# Altium PCB 智能门禁扩展板.PcbDoc
Units mil, origin at the board's own origin, x right, y up, seen from the top; angles counter-clockwise.
Board outline 3356.14 x 2209.22 mil, 2 copper layers (Top Layer, Bottom Layer); 36 components, 34 nets, 215 pads, 40 vias.
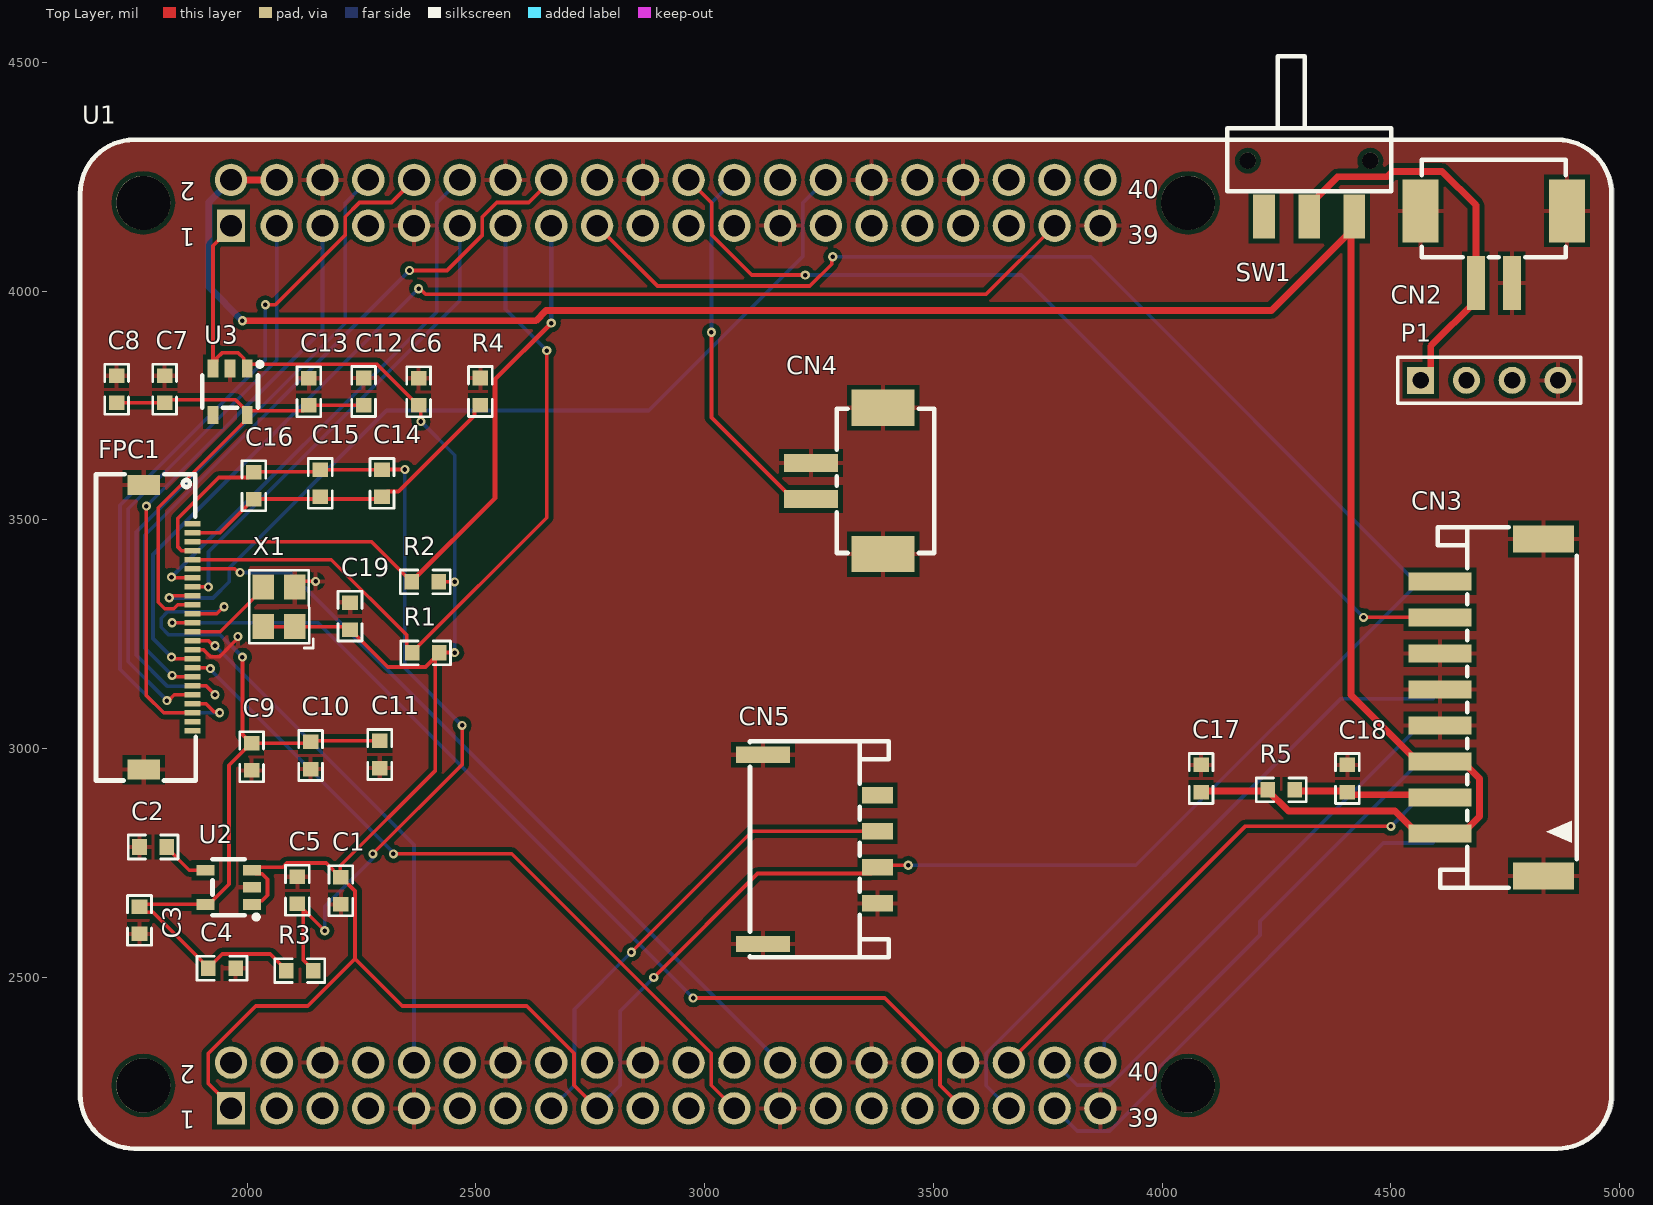
[diagram p0: Top Layer view]
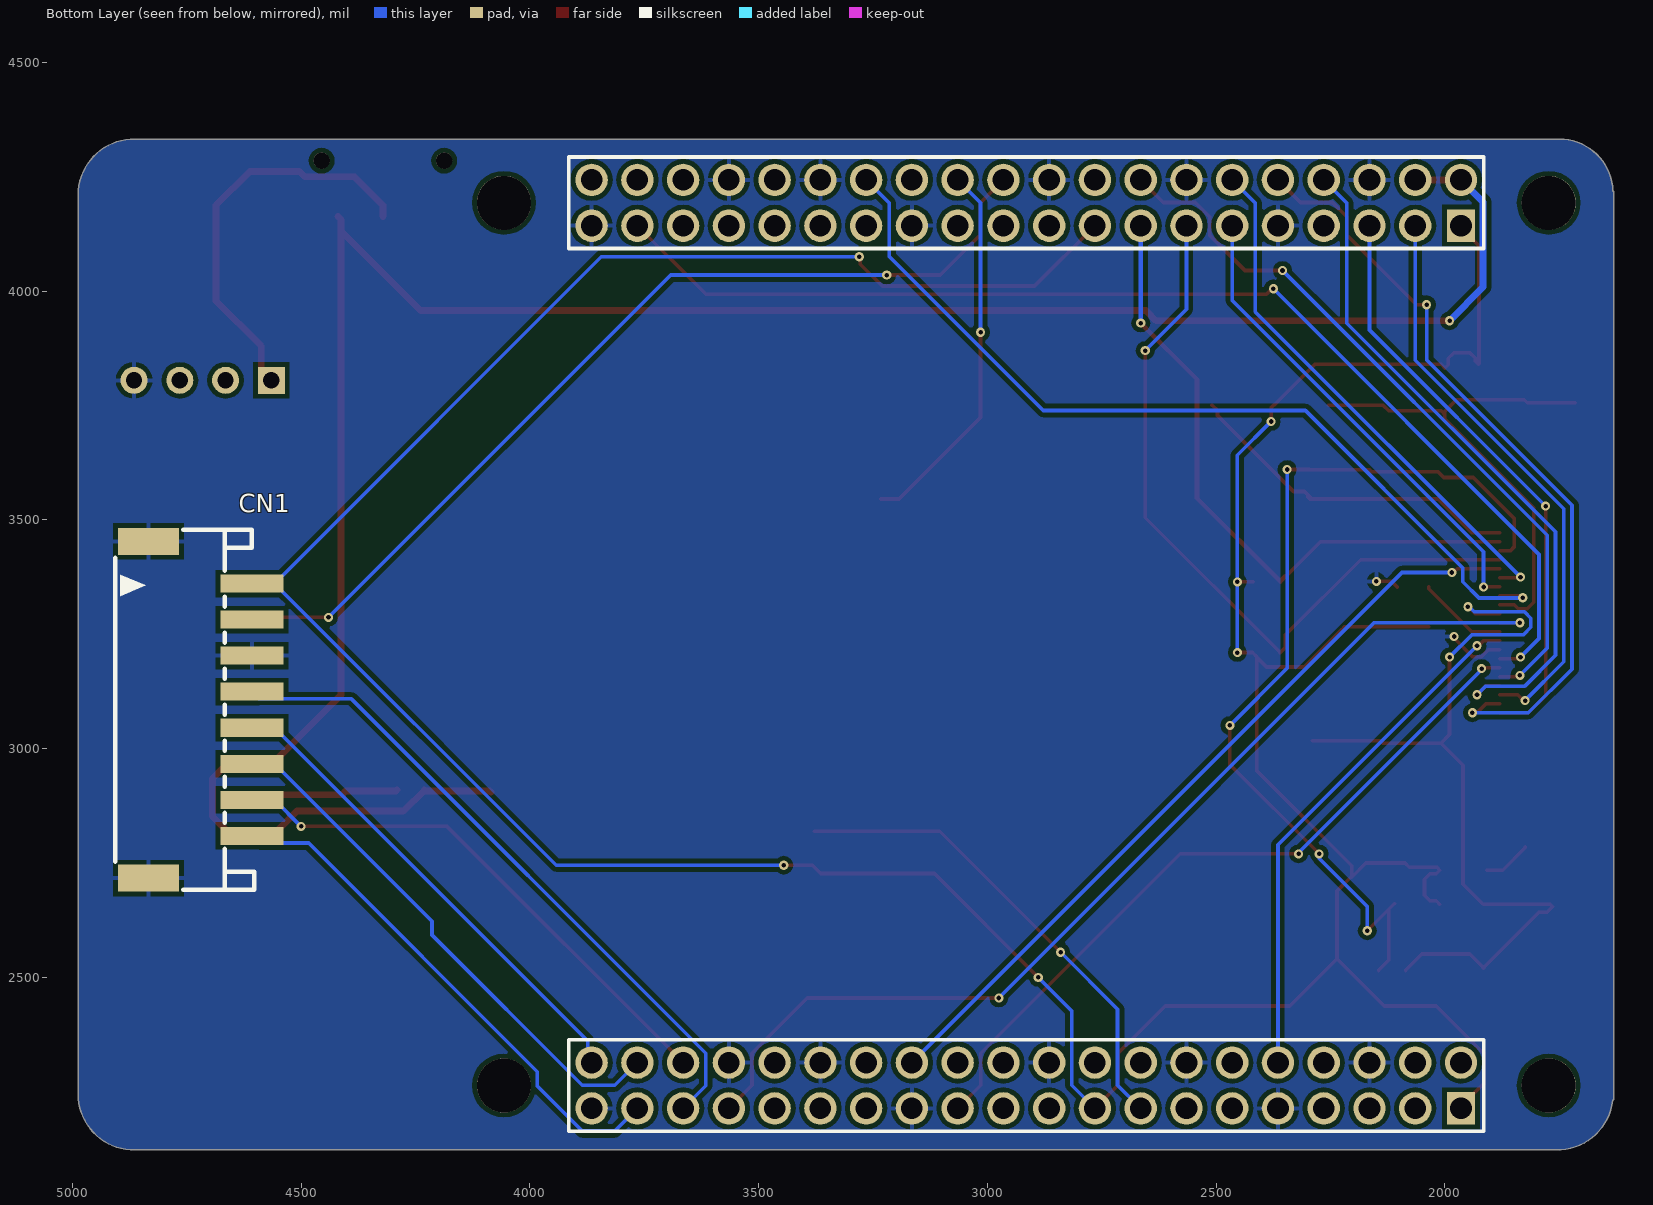
[diagram p1: Bottom Layer view, seen from below]

## Layer stack, top to bottom
Top Solder: solder mask 0.4, Solder Resist, Dk 3.5
Top Layer: signal copper 1.4
Dielectric 1: dielectric 12.6, FR-4, Dk 4.8
Bottom Layer: signal copper 1.4
Bottom Solder: solder mask 0.4, Solder Resist, Dk 3.5

## Board outline
1757.03,2122.89 cw(c1755,2245) 1633.66,2231.22 1633.65,2231.22 cw(c1635,2235) 1630.98,2235 1630.98,4215.16 cw(c1635,4215.16) 1632.97,4218.62 cw(c1749.87,4215.16) 1749.87,4332.11 4862.97,4332.11 cw(c4865,4210) 4987.13,4210 cw(c4865,4210) 4987.11,4208.03 cw(c4983.09,4208.09) 4987.07,4207.49 cw(c4983.09,4206.91) 4987.11,4206.91 4987.11,2247.03 ccw(c4865,2245) 4987.11,2247.06 4987.11,2247.03 cw(c4865,2245) 4987.13,2245 cw(c4865,2245) 4863.03,2122.89 cw(c4863.09,2126.91) 4862.98,2122.89 1757.03,2122.89 ccw(c1755,2245)

## Design rules (kind name [scope] priority, off if disabled: settings)
Clearance [All] p1: gap=10 ignorepadtopadclearanceinfootprint=FALSE except(0: Arc-Hole Track-Hole SMDPad-Hole THPad-Hole Via-Hole Fill-Hole Poly-Hole Region-Hole Text-Hole)
PolygonConnect [All] p1: connectstyle=Relief reliefconductorwidth=10 reliefentries=4 polygonreliefangle="90 Angle" airgapwidth=10
RoutingVias [All] p1: holewidth=10 width=20 viastyle="Through Hole" minholewidth=8 minwidth=10 maxholewidth=28 maxwidth=50
SolderMaskExpansion [All] p1: expansion=4
Width [All] p1: maxlimit=20 minlimit=8 preferedwidth=10
30 further rules are at their usual default settings.

## Components (designator, comment, footprint, x,y, rotation, side; value= is the part's Value field where it differs from the comment)
C1 "Cap" R0603 2210.87,2725.26 r270 top value=1uF
C2 "Cap" R0603 1758.64,2790.87 r0 top value=223
C3 "Cap" R0603 1759.13,2588.64 r90 top value=10uF
C4 "Cap" R0603 1981.36,2514.13 r180 top value=104
C5 "Cap" R0603 2115.87,2726.36 r270 top value=10uF
C6 "Cap" R0603 2369.13,3743.8 r90 top value=1uF
C7 "Cap" R0603 1825.87,3821.36 r270 top value=10uF
C8 "Cap" R0603 1720.87,3821.36 r270 top value=104
C9 "Cap" R0603 2004.13,2946.18 r90 top value=104
C10 "Cap" R0603 2133.14,2948.99 r90 top value=104
C11 "Cap" R0603 2284.13,2951.18 r90 top value=104
C12 "Cap" R0603 2260.87,3816.36 r270 top value=104
C13 "Cap" R0603 2140.87,3815.84 r270 top value=4.7uF
C14 "Cap" R0603 2289.13,3543.64 r90 top value=1uF
C15 "Cap" R0603 2154.13,3543.64 r90 top value=104
C16 "Cap" R0603 2009.13,3538.64 r90 top value=104
C17 "Cap" R0603 4090.87,2970.67 r270 top value=10uF
C18 "Cap" R0603 4410.87,2970.67 r270 top value=104
C19 "Cap" R0603 2230.87,3325.67 r270 top value=0.1uF
CN1 "PH2.0-8P" CONN-SMD_X2016WRS-08-9TSW 4725,3085 r270 bottom
CN2 "PH2.0-2P" CONN-SMD_PH2.0-1X2PW 4725,4125 r0 top
CN3 "PH2.0-8P" CONN-SMD_X2016WRS-08-9TSW 4725,3090 r90 top
CN4 "PH2.0-2P" CONN-SMD_PH2.0-1X2PW 3340,3585 r270 top
CN5 "PH2.0-4PWB卧式" CONN-SMD_PH2.0-4PWB 3240,2780 r90 top
FPC1 "AFC30-S24FCA-00" FPC-SMD_AFC30-S24FCA-00 1781.67,3265.18 r270 top
P1 "Header 4" HDR1X4 4565,3805 r0 top
R1 "Res1" R0603 2354.33,3215.24 r0 top value=10K
R2 "Res1" R0603 2353.64,3370.24 r0 top value=10K
R3 "Res1" R0603 2079.33,2520.87 r0 top value=10R
R4 "Res1" R0603 2504.13,3744.33 r90 top value=0R
R5 "Res1" R0603 4224.33,2915.87 r0 top value=0R
SW1 "TA-3525-A2" SW-SMD_3P-L9.1-W3.5-P2.50-EH6.8 4321.14,4316.53 r180 top
U1 "ART-Pi" "PCBComponent_1 - duplicate" 3308.7,3228.35 r0 top
U2 "RT9193-28GB" SOT-23-5_L3.0-W1.7-P0.95-LS2.8-BR 1960,2695 r0 top
U3 "RT9013-15GB(Z00)" SOT-23-5_L3.0-W1.7-P0.95-LS2.8-BR 1965,3780 r90 top
X1 "OXETGLJANF-24MHZ" OSC-SMD_4P-L3.2-W2.5-BL 2075,3305 r90 top

## Footprints (in the part's own frame and the unit in brackets; to place one, negate y for a bottom-side part, rotate by r counter-clockwise, add the part's x,y. Pads: shape width x height; smd on the part's side, far side on the other; paste and mask are expansions set on the pad)
CONN-SMD_PH2.0-1X2PW [mm]
  rect 1x3 smd: 1(-1,-2.733) 2(1,-2.733)
  rect 2x3.5 smd: 3(4.064,1.278) 4(-4.064,1.278)
  silkscreen extent -4,-1.29 4,4.11
CONN-SMD_PH2.0-4PWB [mm]
  rect 0.9x1.7 smd: 1(-3,-3.5) 2(-1,-3.5) 3(1,-3.5) 4(3,-3.5)
  rect 0.9x3 smd: 5(5.25,2.85) 6(-5.25,2.85)
  silkscreen extent -6,-4.12 6,3.57
CONN-SMD_X2016WRS-08-9TSW [mm]
  rect 1x3.5 smd: 1(-7,2.988) 2(-5,2.988) 3(-3,2.988) 4(-1,2.988) 5(1,2.988) 6(3,2.988) 7(5,2.988) 8(7,2.988)
  rect 1.5x3.4 smd: 9(9.35,-2.761) 10(-9.35,-2.761)
  silkscreen extent -10,-4.61 10,3.11
FPC-SMD_AFC30-S24FCA-00 [mm]
  rect 0.3x0.9 smd: 1(-5.755,2.514) 2(-5.255,2.514) 3(-4.755,2.514) 4(-4.255,2.514) 5(-3.755,2.514) 6(-3.255,2.514) 7(-2.755,2.514) 8(-2.255,2.514) 9(-1.755,2.514) 10(-1.255,2.514) 11(-0.755,2.514) 12(-0.255,2.514) 13(0.245,2.514) 14(0.746,2.514) 15(1.246,2.514) 16(1.746,2.514) 17(2.245,2.514) 18(2.745,2.514) 19(3.245,2.514) 20(3.745,2.514) 21(4.245,2.514) 22(4.745,2.514) 23(5.245,2.514) 24(5.745,2.514)
  rect 1.1x1.8 smd: 25(7.896,-0.186) 26(-7.905,-0.187)
  silkscreen extent -8.5,-2.84 8.5,2.69
HDR1X4 [mm] "Connector; Header; 4 Position"
  rect 1.5x1.5 hole 0.9: 1(0,0)
  round 1.5 hole 0.9: 2(2.54,0) 3(5.08,0) 4(7.62,0)
  silkscreen extent -1.27,-1.27 8.89,1.27
OSC-SMD_4P-L3.2-W2.5-BL [mm]
  rect 1.4x1.2 smd: 1(-0.973,-0.748) 2(1.227,-0.748) 3(1.227,1.002) 4(-0.973,1.002)
  silkscreen extent -2.16,-1.78 2.16,1.78
"PCBComponent_1 - duplicate" [mm]
  rect 1.575x1.8 hole 1.2: 1(-34.13,23.23) 41(-34.13,-25.77)
  round 1.8 hole 1.2: 2(-34.13,25.77) 3(-31.59,23.23) 4(-31.59,25.77) 5(-29.05,23.23) 6(-29.05,25.77) 7(-26.51,23.23) 8(-26.51,25.77) 9(-23.97,23.23) 10(-23.97,25.77) 11(-21.43,23.23) 12(-21.43,25.77) 13(-18.89,23.23) 14(-18.89,25.77) 15(-16.35,23.23) 16(-16.35,25.77) 17(-13.81,23.23) 18(-13.81,25.77) 19(-11.27,23.23) 20(-11.27,25.77) 21(-8.73,23.23) 22(-8.73,25.77) 23(-6.19,23.23) 24(-6.19,25.77) 25(-3.65,23.23) 26(-3.65,25.77) 27(-1.11,23.23) 28(-1.11,25.77) 29(1.43,23.23) 30(1.43,25.77) 31(3.97,23.23) 32(3.97,25.77) 33(6.51,23.23) 34(6.51,25.77) 35(9.05,23.23) 36(9.05,25.77) 37(11.59,23.23) 38(11.59,25.77) 39(14.13,23.23) 40(14.13,25.77) 42(-34.13,-23.23) 43(-31.59,-25.77) 44(-31.59,-23.23) 45(-29.05,-25.77) 46(-29.05,-23.23) 47(-26.51,-25.77) 48(-26.51,-23.23) 49(-23.97,-25.77) 50(-23.97,-23.23) 51(-21.43,-25.77) 52(-21.43,-23.23) 53(-18.89,-25.77) 54(-18.89,-23.23) 55(-16.35,-25.77) 56(-16.35,-23.23) 57(-13.81,-25.77) 58(-13.81,-23.23) 59(-11.27,-25.77) 60(-11.27,-23.23) 61(-8.73,-25.77) 62(-8.73,-23.23) 63(-6.19,-25.77) 64(-6.19,-23.23) 65(-3.65,-25.77) 66(-3.65,-23.23) 67(-1.11,-25.77) 68(-1.11,-23.23) 69(1.43,-25.77) 70(1.43,-23.23) 71(3.97,-25.77) 72(3.97,-23.23) 73(6.51,-25.77) 74(6.51,-23.23) 75(9.05,-25.77) 76(9.05,-23.23) 77(11.59,-25.77) 78(11.59,-23.23) 79(14.13,-25.77) 80(14.13,-23.23)
  round 3 hole 3 unplated: ""(-39,-24.5) ""(-39,24.5) ""(19,-24.5) ""(19,24.5)
  silkscreen extent -42.5,-28 42.5,28
R0603 [mil]
  rect 31.75x34.02 smd: 1(6.36,-5.87) 2(65.67,-5.87)
  silkscreen extent -19,-32 91,20
SOT-23-5_L3.0-W1.7-P0.95-LS2.8-BR [mm]
  rect 1x0.6 smd: 1(1.3,-0.899) 2(1.3,0.05) 3(1.3,1) 4(-1.3,1.001) 5(-1.3,-0.899)
  silkscreen extent -0.9,-1.73 1.65,1.6
SW-SMD_3P-L9.1-W3.5-P2.50-EH6.8 [mm]
  rect 1.2x2.45 smd: 1(-2.5,3.901) 2(0,3.901) 3(2.5,3.901)
  round 0.9 hole 0.9 unplated: ""(-3.4,0.801) ""(3.4,0.801)
  silkscreen extent -4.55,-5 4.55,2.5

## Part data
C1 C2 C3 C4 C5 C6 C7 C8 C9 C10 C11 C12 C13 C14 C15 C16 C17 C18 C19: "Capacitor", LatestRevisionDate=17-Jul-2002, LatestRevisionNote="Re-released for DXP Platform.", PackageDescription="Radial Cap, Thru-Hole; 2 Leads; 0.3 in Pin Spacing", PackageReference=RAD-0.3, Published=8-Jun-2000, Publisher="Altium Limited"
P1: "Header, 4-Pin", LatestRevisionDate=17-Jul-2002, LatestRevisionNote="Re-released for DXP Platform.", Publisher="Altium Limited"
R1 R2 R3 R4 R5: "Resistor", LatestRevisionDate=17-Jul-2002, LatestRevisionNote="Re-released for DXP Platform.", PackageDescription="Axial Device, Thru-Hole; 2 Leads; 0.3 in Pin Spacing", PackageReference=AXIAL-0.3, Published=8-Jun-2000, Publisher="Altium Limited"

## Via types
v1: diameter 20, hole 10, Top Layer to Bottom Layer, 40 vias

## Nets (pads, with @x,y where several pads share a name; then routed paths per layer and width w, separated by ;. In a path a pad name is that pad's centre, name@x,y a point inside that pad or via, vN(x,y) a via of type N, cw(c..) or ccw(c..) an arc to the next point about the centre after c; other vN are vias at no path point)
3V3: C1.1 C6.1 C19.2 CN1.1 CN5.2 R1.2 R2.2 U1.1 U1.17 U1.41 U1.57 U2.1 U2.3 U3.1 U3.3 X1.1 X1.4 | length 8858.3
  Top Layer w8: U1.41 1965,2218.21 1915.57,2267.64 1915.57,2334.25 2018.94,2437.63 2132.63,2437.63 2236.01,2541.01 ; U1.1 1965,4138.48 1925.61,4099.09 1925.61,3840.94 1926.56,3840 1933.42,3846.87 1933.42,3852.89 1945.4,3864.87 1980.62,3864.87 1992.6,3852.89 1992.6,3838.99 U3.1 2000.41,3832.06 2008.22,3839.88 2284.16,3839.88 2373.87,3750.17 C6.1 2380,3745.17 v1(2380,3715) ; U2.1 2018.99,2667.4 2032.89,2667.4 2044.87,2679.38 2044.87,2714.6 2032.89,2726.58 2018.99,2726.58 U2.3 2017.39,2740.6 2077.91,2740.6 2087.19,2749.88 2172.89,2749.88 2203.87,2718.9 2203.87,2743.87 2411,2951 R1.2@2411,3199.24 ; X1.4 X1.1 2218.31,3266.69 C19.2 2226.13,3260 2307.77,3178.36 2390.12,3178.36 R1.2@2411,3199.24 ; C1.1@2206.13,2718.9 2236.01,2689.02 2236.01,2541.01 ; R2.2 v1(2453.78,3364.37) ; v1@2460,3209.37 2453.78,3209.37 2453.15,3210 2420.63,3210 R1.2 2411,3200.37 R1.2@2411,3199.24 ; U1.57 2714.43,2264.35 2714.43,2334.25 2611.05,2437.63 2339.38,2437.63 2236.01,2541.01 ; U1.17 2896.91,4011 3229.94,4011 3277.7,4058.76 3277.7,4072.7 v1(3280,4075) ; v1(2888.75,2500) 3115.66,2726.91 3364.08,2726.91 CN5.2 3382.17,2745 v1(3445,2745)
  Bottom Layer w8: v1(2380,3715) 2453.78,3641.22 v1(2453.78,3364.37) v1(2453.78,3210) ; U1.57 2815.57,2264.35 2815.57,2426.82 v1(2888.75,2500) ; v1(3280,4075) 3843.72,4075 CN1.1@4558.13,3360.59 ; v1(3445,2745) 3942.54,2745 CN1.1@4558.13,3360.59 ; CN1.1 CN1.1@4558.13,3360.59
5V: C17.2 CN3.1 CN3.3 R5.1 SW1.1 U1.2 U1.4 | length 5117.2
  Top Layer w15: U1.2 U1.4 ; v1(1990,3935) 2631.11,3935 2653.61,3957.5 4238.72,3957.5 SW1.1@4412.5,4131.28 ; C17.2 4087.5,2907.5 4228.19,2907.5 R5.1 4230.69,2908.87 4276.01,2863.54 4509,2863.54 4558.13,2814.41 4656.56,2814.41 4693.74,2851.59 4693.74,2934.7 4656.56,2971.89 4558.13,2971.89 4412.5,3117.52 SW1.1@4412.5,4131.28 ; SW1.1 4412.5,4155.89 SW1.1@4412.5,4131.28
  Bottom Layer w15: U1.2 1916.5,4194.41 1916.5,4008.5 v1(1990,3935)
5VA: C18.2 CN3.2 R5.2 | length 324.3
  Top Layer w15: R5.2 4292.5,2907.5 4402.5,2907.5 4410.93,2899.07 4601.42,2899.07 CN3.2
AGND: C14.1 C15.1 C16.1 FPC1.2 R4.1 | length 755.5
  Top Layer w8: FPC1.2 1940.92,3472.05 2014.49,3545.62 2295,3545.62 C14.1@2299.38,3550 ; C14.1 2306.88,3561.88 2330.82,3561.88 2496.99,3728.05 2496.99,3738.81 2508.87,3750.69 R4.1
GND: C1.2 C2.1 C3.1 C4.1 C5.1 C6.2 C7.1 C8.1 C9.1 C10.1 C11.1 C12.1 C13.1 C17.1 C18.1 C19.1 CN1.3 CN1.9 CN1.10 CN2.2 CN2.3 CN2.4 CN3.4 CN3.5 CN3.6 CN3.9 CN3.10 CN4.1 CN4.3 CN4.4 CN5.1 CN5.5 CN5.6 FPC1.15 FPC1.25 FPC1.26 P1.4 R4.2 U1.6 U1.9 U1.14 U1.20 U1.25 U1.30 U1.34 U1.39 U1.46 U1.49 U1.54 U1.60 U1.65 U1.70 U1.74 U1.79 U2.2 U3.2 X1.2 | length 176.8
  Top Layer w8: FPC1.15 1904.92,3216.14 1920.06,3201 1939.94,3201 1977.7,3238.76 1977.7,3242.7 v1(1980,3245) ; X1.2 2116.74,3365.59 v1(2150,3365.59)
LED_PWM: CN4.2 U1.24 | length 831.1
  Top Layer w8: v1(3015,3910) 3015,3723.65 3193.03,3545.62 CN4.2
  Bottom Layer w8: v1(3015,3910) 3015,4192.91 U1.24
LS_ADC: CN5.3 U1.55 | length 1061
  Top Layer w8: v1(2840,2555) 3104.37,2819.37 CN5.3
  Bottom Layer w8: U1.55 2715.57,2264.35 2715.57,2430.57 v1(2840,2555)
MCLK: FPC1.13 X1.3 | length 197.7
  Top Layer w8: FPC1.13 1941.7,3255.51 2035.55,3349.36 X1.3
NetC2_2: C2.2 U2.4 | length 106.1
  Top Layer w8: C2.2 1824.31,2783.87 1873.78,2734.39 U2.4
OV2640_D0: FPC1.19 U1.8 | length 1513.6
  Top Layer w8: FPC1.19 1910.32,3137.4 v1(1930,3117.72)
  Bottom Layer w8: v1(1930,3117.72) 1911.72,3136 1826.44,3136 1758.38,3204.06 1758.38,3473.83 2214.43,3929.89 2214.43,4192.35 U1.8
OV2640_D1: FPC1.21 U1.10 | length 1713.9
  Top Layer w8: FPC1.21 1910.35,3098.03 1927.74,3080.64 1937.7,3080.64 v1(1940,3078.35) ; v1(2040,3970) 2062,3970.01 2214.43,4122.44 2214.43,4162.25 2245.66,4193.48 2315.57,4193.48 U1.10
  Bottom Layer w8: v1(1940,3078.35) 1817.71,3078.35 1722.38,3173.68 1722.38,3531.77 2040,3849.4 v1(2040,3970)
OV2640_D2: FPC1.22 U1.5 | length 1302.6
  Top Layer w8: v1(1780,3530) 1780,3116.06 1817.71,3078.35 FPC1.22
  Bottom Layer w8: v1(1780,3530) 2165,3915 U1.5
OV2640_D3: FPC1.20 U1.3 | length 1268.3
  Top Layer w8: v1(1825,3105) 1828.25,3105 1840.96,3117.72 FPC1.20
  Bottom Layer w8: v1(1825,3105) 1740.38,3189.62 1740.38,3524.32 2065,3848.94 U1.3
OV2640_D4: FPC1.18 U1.16 | length 1610.3
  Top Layer w8: v1(1836.38,3160) 1839.62,3160 1842.54,3157.09 FPC1.18 ; v1(2355,4045) 2436.99,4045 2514.43,4122.44 2514.43,4162.25 2545.66,4193.48 2615.57,4193.48 U1.16
  Bottom Layer w8: v1(1836.38,3160) 1776.38,3220 1776.38,3466.38 v1(2355,4045)
OV2640_D5: FPC1.16 U1.37 | length 2566.5
  Top Layer w8: v1(1835,3200) 1838.25,3200 1841.79,3196.46 FPC1.16 ; v1(2375,4005) 2378.25,4005 2390.25,3993 3615.09,3993 U1.37
  Bottom Layer w8: v1(1835,3200) 1794.38,3240.62 1794.38,3424.38 v1(2375,4005)
OV2640_D6: FPC1.14 U1.50 | length 1145.3
  Top Layer w8: FPC1.14 1915.93,3235.83 1926.75,3225 v1(1930,3225)
  Bottom Layer w8: v1(1930,3225) 2365,2790 U1.50
OV2640_D7: FPC1.12 U1.73 | length 2253.5
  Top Layer w8: v1(1836.38,3275) 1866.91,3275 1867.11,3275.2 FPC1.12 ; v1(2975,2455) 3393.69,2455 3514.43,2334.25 3514.43,2264.35 U1.73
  Bottom Layer w8: v1(1836.38,3275) 2155,3275 v1(2975,2455)
OV2640_HSYNC: FPC1.9 U1.28 | length 1952.3
  Top Layer w8: v1(1830,3329.74) 1833.25,3329.74 1837.76,3334.25 FPC1.9
  Bottom Layer w8: v1(1830,3329.74) 1830.44,3329.3 1925.63,3329.3 1961,3364.67 1961,3394.94 2305.06,3739 2877.94,3739 3214.43,4075.49 3214.43,4192.35 U1.28
OV2640_PCLK: FPC1.17 U1.63 | length 1627.1
  Top Layer w8: FPC1.17 1918.23,3176.77 v1(1920,3175) ; v1(2320,2770) 2578.69,2770 3014.43,2334.25 3014.43,2264.35 U1.63
  Bottom Layer w8: v1(1920,3175) 1920,3172.5 2320,2772.5 v1(2320,2770)
OV2640_PWDN: FPC1.8 U1.11 | length 1052.5
  Top Layer w8: FPC1.8 1915.05,3353.94 v1(1915.69,3353.3)
  Bottom Layer w8: v1(1915.69,3353.3) 1915.69,3430.23 2465,3979.54 U1.11
OV2640_RST: FPC1.6 U1.66 | length 1731.5
  Top Layer w8: FPC1.6 1973.44,3393.31 1981.75,3385 v1(1985,3385)
  Bottom Layer w8: v1(1985,3385) 2093.78,3385 U1.66
OV2640_SCL: FPC1.5 R1.1 U1.13 | length 1672.9
  Top Layer w8: FPC1.5 2184,3412.99 2348.81,3248.18 2348.81,3221.25 R1.1 2360.69,3210.5 2655,3504.81 v1(2655,3870)
  Bottom Layer w8: U1.13 2565,3960 v1(2655,3870)
OV2640_SDA: FPC1.3 R2.1 U1.15 | length 1420.2
  Top Layer w8: FPC1.3 2272.01,3452.36 R2.1@2347.99,3376.38
  Top Layer w10: R2.1@2347.99,3376.38 2349.12,3376.38 R2.1@2360,3365.5 ; R2.1 R2.1@2360,3365.5 ; v1(2665,3930) 2542.01,3807.01 2542.01,3547.51 R2.1@2360,3365.5
  Bottom Layer w10: v1(2665,3930) U1.15
OV2640_VSYNC: FPC1.7 U1.12 | length 1175.1
  Top Layer w8: v1(1835,3375) 1836.38,3373.62 FPC1.7
  Bottom Layer w8: v1(1835,3375) 2414.43,3954.43 2414.43,4192.35 U1.12
RC522_MISO: CN1.6 U1.78 | length 1171.3
  Bottom Layer w8: U1.78 3814.43,2264.35 3885.47,2264.35 4213.96,2592.83 4213.96,2622.72 4558.13,2966.89 CN1.6
RC522_MOSI: CN1.5 U1.80 | length 1068.2
  Bottom Layer w8: U1.80 3873.71,2322.49 3873.71,2361.21 4558.13,3045.63 CN1.5
RC522_RST: CN1.4 U1.75 | length 1460
  Bottom Layer w8: U1.75 3615.57,2263.21 3615.57,2334.25 4390,3108.68 4591.66,3108.68 CN1.4
RC522_SCK: CN1.7 U1.76 | length 1180.3
  Top Layer w8: U1.76 4181.22,2830 v1(4499.98,2830)
  Bottom Layer w8: v1(4499.98,2830) 4558.13,2888.15 CN1.7
RC522_SDA: CN1.8 U1.77 | length 1148.5
  Bottom Layer w8: U1.77 3814.43,2164.35 3885.47,2164.35 3983.68,2262.55 3983.68,2294.03 4483.37,2793.72 4591.66,2793.72 CN1.8
RELAY: CN3.7 U1.22 | length 2079.3
  Top Layer w8: U1.22 3015.57,4192.35 3015.57,4122.44 3103,4035 v1(3220,4035) ; v1(4440,3286.85) CN3.7
  Bottom Layer w8: v1(3220,4035) 3691.85,4035 v1(4440,3286.85)
USB_5V: CN2.1 P1.1 SW1.2 | length 883.2
  Top Layer w15: SW1.2 4321.13,4187.56 4383.36,4249.78 4491.52,4249.78 4503.46,4261.72 4611.62,4261.72 4685.64,4187.69 4685.64,3978.03 4587.03,3879.42 4587.03,3827.03 P1.1
VDD2V8: C3.2 C4.2 C9.2 C10.2 C11.2 FPC1.11 R3.1 U2.5 | length 1876.5
  Top Layer w8: FPC1.11 1934,3294.88 1949.12,3310 v1(1950,3310) ; C4.2 C4.2@1915.69,2521.13 ; v1(1990,3200) 1990,3030.72 C9.2@2008.87,3011.85 ; R3.1 2085.69,2516.13 2050.81,2551.01 1945.57,2551.01 C4.2@1915.69,2521.13 ; C11.2 2141.19,3016.85 2136.19,3011.85 C9.2@2008.87,3011.85 ; C4.2@1915.69,2521.13 1794.39,2642.43 1776.88,2642.43 C3.2 1770.28,2659.59 1916.69,2659.59 1960.75,2703.65 1960.75,2963.73 C9.2@2008.87,3011.85
  Bottom Layer w8: v1(1950,3310) 1946.75,3310 1935.75,3299 1826.44,3299 1812.38,3284.94 1812.38,3265.06 1828.44,3249 1941,3249 v1(1990,3200)
VDD_1V3: C7.2 C8.2 C12.2 C13.2 FPC1.10 U3.5 | length 1143.4
  Top Layer w8: C8.2 C7.2 1826.82,3762.51 1974.59,3762.51 2000.41,3736.69 U3.5@2000.41,3730.48 ; FPC1.10 1848.77,3314.57 1839.94,3305.74 1820.06,3305.74 1806,3319.8 1806,3526.54 2000.41,3720.94 U3.5@2000.41,3730.48 ; C12.2 2135.52,3750.69 2123.12,3738.29 2008.22,3738.29 U3.5@2000.41,3730.48
VDD_2V8A: C5.2 C14.2 C15.2 C16.2 FPC1.4 R3.2 | length 2051.4
  Top Layer w8: FPC1.4 1856.89,3432.68 1848.91,3440.66 1848.91,3503.44 1937.91,3592.43 2002.5,3592.43 2015,3604.93 2160,3604.93 2164.38,3609.31 C14.2 2295.69,3610 v1(2345,3610) ; C5.2 2111.13,2660.69 C5.2@2123.01,2648.81 ; R3.2 2145,2516.13 2123.01,2538.12 C5.2@2123.01,2648.81 ; v1@2170,2600 v1(2170,2601.82) C5.2@2123.01,2648.81 ; v1(2275,2770) 2470,2965 v1(2470,3050.63)
  Bottom Layer w8: v1(2170,2601.82) 2170,2655 2275,2760 v1(2275,2770) ; v1(2345,3610) 2345,3175.63 v1(2470,3050.63)
pads on no net: CN1.2 CN3.8 CN5.4 FPC1.1 FPC1.23 FPC1.24 P1.2 P1.3 SW1. SW1.3 U1. U1.7 U1.18 U1.19 U1.21 U1.23 U1.26 U1.27 U1.29 U1.31 U1.32 U1.33 U1.35 U1.36 U1.38 U1.40 U1.42 U1.43 U1.44 U1.45 U1.47 U1.48 U1.51 U1.52 U1.53 U1.56 U1.58 U1.59 U1.61 U1.62 U1.64 U1.67 U1.68 U1.69 U1.71 U1.72 U3.4

## Polygon pours and split planes (outlines as drawn)
GND on Top Layer "GND_L01_P002" (solid, remove dead copper, pour order 2): 1757.03,2122.89 cw(c1755,2245) 1633.66,2231.22 1633.65,2231.22 cw(c1635,2235) 1630.98,2235 1630.98,4215.16 cw(c1635,4215.16) 1632.97,4218.62 cw(c1749.87,4215.16) 1749.87,4332.11 4862.97,4332.11 cw(c4865,4210) 4987.13,4210 cw(c4865,4210) 4987.11,4208.03 cw(c4983.09,4208.09) 4987.07,4207.49 cw(c4983.09,4206.91) 4987.11,4206.91 4987.11,2247.03 ccw(c4865,2245) 4987.11,2247.06 4987.11,2247.03 cw(c4865,2245) 4987.13,2245 cw(c4865,2245) 4863.03,2122.89 cw(c4863.09,2126.91) 4862.98,2122.89 1757.03,2122.89 ccw(c1755,2245)
GND on Bottom Layer "GND_L02_P003" (solid, remove dead copper, pour order 3): 1757.03,2122.89 cw(c1755,2245) 1633.66,2231.22 1633.65,2231.22 cw(c1635,2235) 1630.98,2235 1630.98,4215.16 cw(c1635,4215.16) 1632.97,4218.62 cw(c1749.87,4215.16) 1749.87,4332.11 4862.97,4332.11 cw(c4865,4210) 4987.13,4210 cw(c4865,4210) 4987.11,4208.03 cw(c4983.09,4208.09) 4987.07,4207.49 cw(c4983.09,4206.91) 4987.11,4206.91 4987.11,2247.03 ccw(c4865,2245) 4987.11,2247.06 4987.11,2247.03 cw(c4865,2245) 4987.13,2245 cw(c4865,2245) 4863.03,2122.89 cw(c4863.09,2126.91) 4862.98,2122.89 1757.03,2122.89 ccw(c1755,2245)

## Other copper
Top Layer:
  region: 3355,2815

## Silkscreen, mask and mechanical layers (free items; w line width, h text height)
Mechanical 1:
  lines w10: 1633.66,2231.22 cw(c1635,2235) 1630.98,2235 1630.98,4215.16 cw(c1635,4215.16) 1632.97,4218.62 cw(c1749.87,4215.16) 1749.87,4332.11 4862.97,4332.11 cw(c4865,4210) 4987.13,4210 cw(c4865,4210) 4987.11,4208.03 ; 1633.66,2231.22 ccw(c1755,2245) 1757.03,2122.89 ; 1633.65,2231.22 1633.66,2231.22 ; 1757.03,2122.89 ccw(c1755,2245) 1757.06,2122.89 ; 1757.03,2122.89 4862.98,2122.89 ccw(c4863.09,2126.91) 4863.03,2122.89 ; 4863.03,2122.89 ccw(c4865,2245) 4987.13,2245 ccw(c4865,2245) 4987.11,2247.03 ; 4863.03,2122.89 4863.03,2122.89 ; 4987.11,2247.03 ccw(c4865,2245) 4987.11,2247.06 ; 4987.11,2247.06 4987.11,2247.03 ; 4987.11,2247.03 4987.11,4206.91 ccw(c4983.09,4206.91) 4987.07,4207.49 ccw(c4983.09,4208.09) 4987.11,4208.03 ; 4987.11,4208.03 4987.11,4208.03

## Text inside footprints (layer, text, board x,y; h text height)
U1: Top Overlay "40" at 3925,2274.09 h39.37; Top Overlay "39" at 3925,2174.09 h39.37; Top Overlay "2" at 1886.74,2308.46 h39.37 r180; Top Overlay "1" at 1886.74,2208.46 h39.37 r180; Top Overlay "40" at 3925,4203.22 h39.37; Top Overlay "39" at 3925,4103.22 h39.37; Top Overlay "2" at 1886.74,4237.59 h39.37 r180; Top Overlay "1" at 1886.74,4137.59 h39.37 r180